# EAGLE board greenhousectrl-latest-monday-no-errors-fixed-cap (EAGLE 7.7.0)
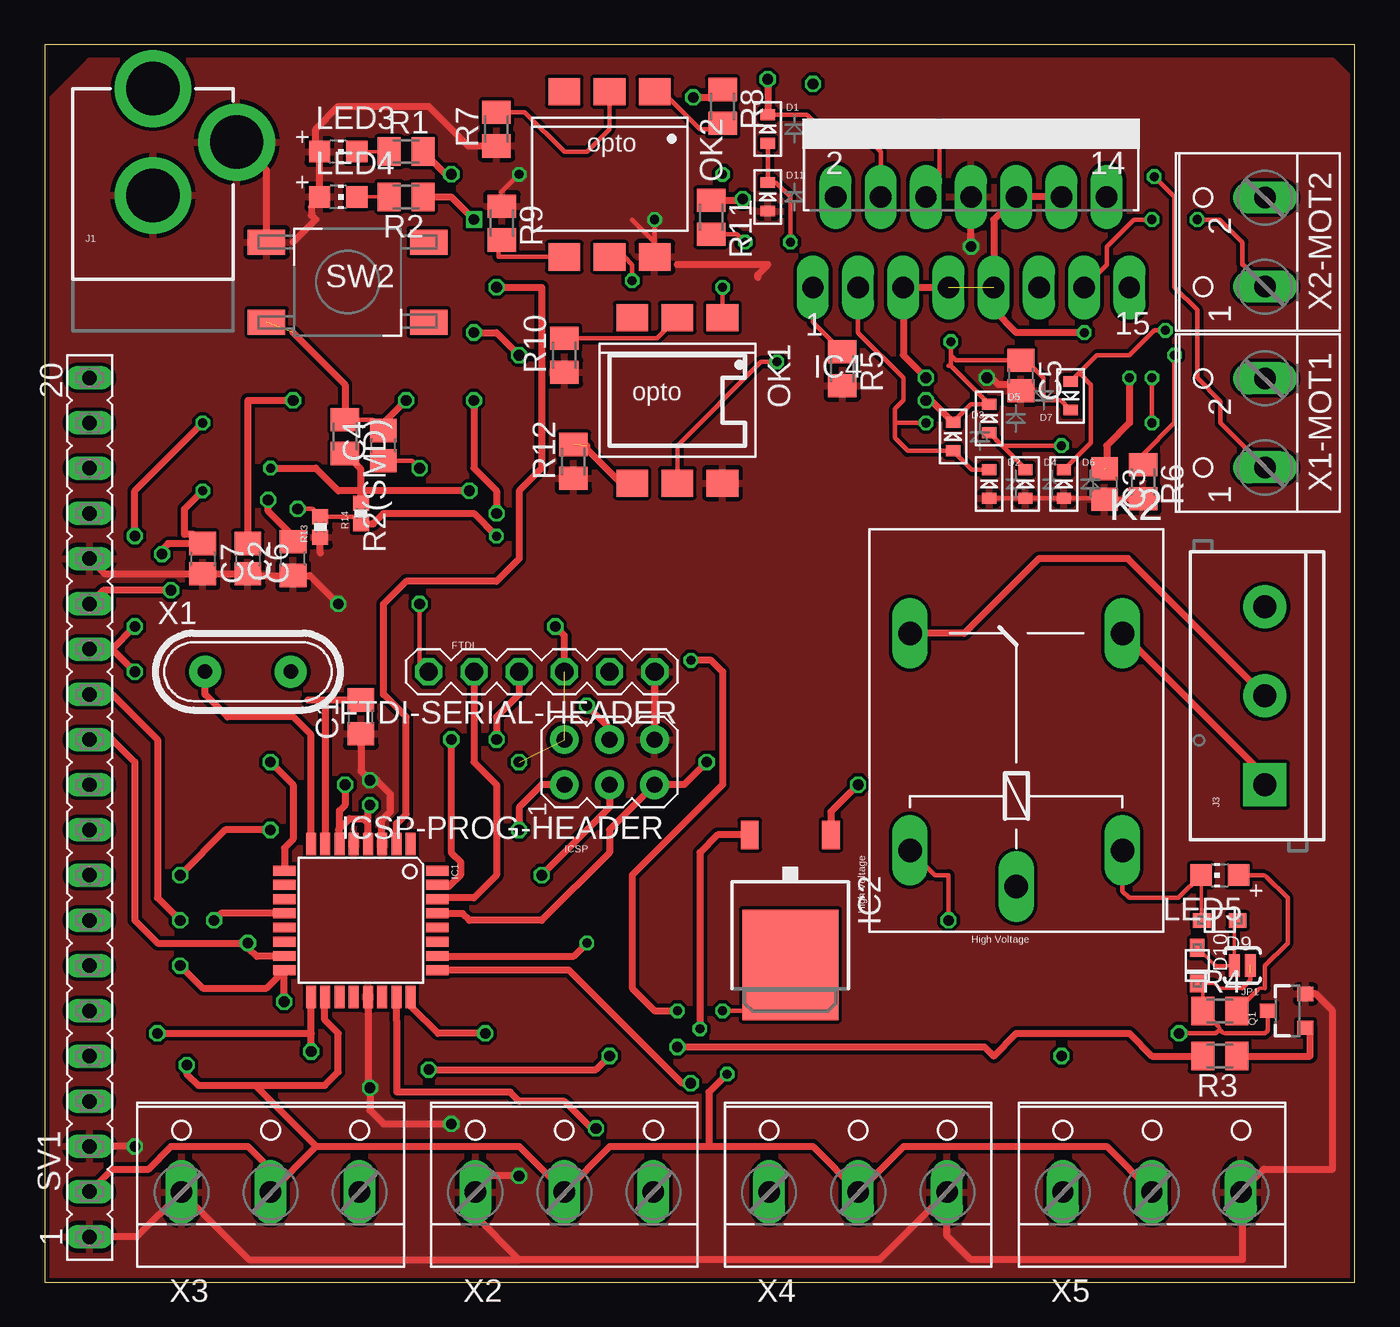
[diagram p0: board, top side]
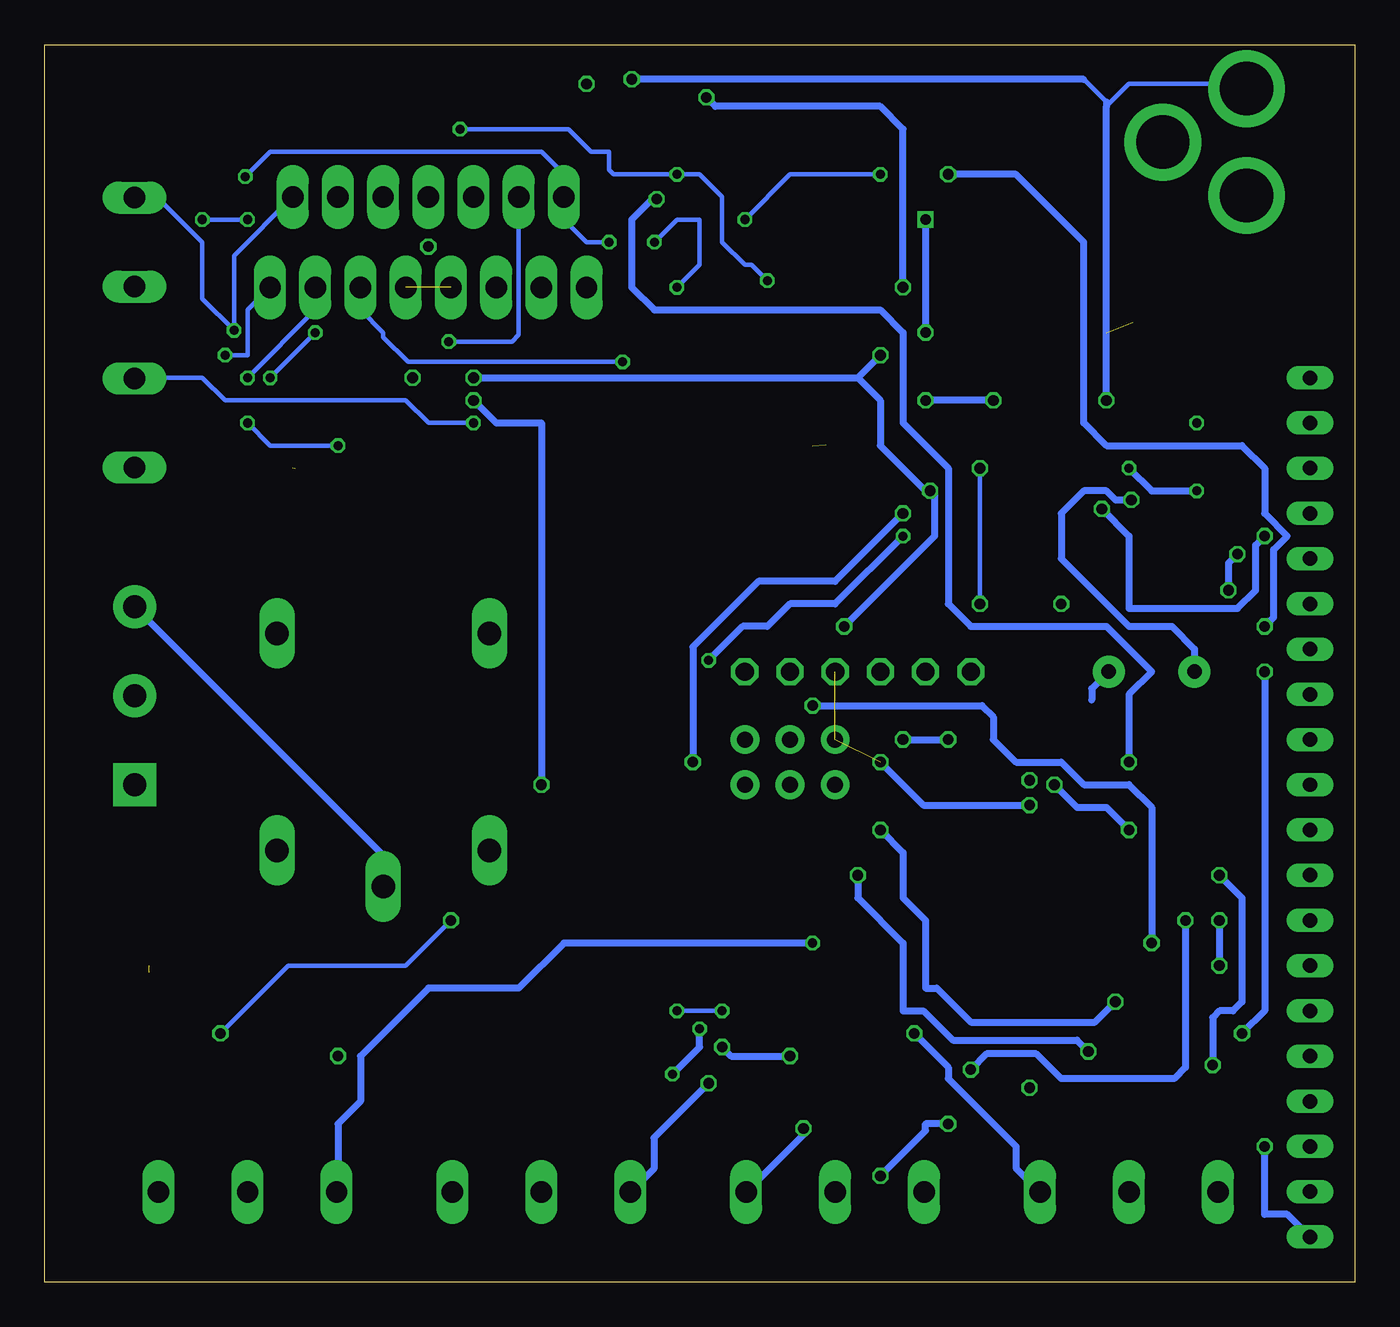
[diagram p1: board, bottom side, seen from below]

Size 73.64 x 69.52 mm. Coordinates in mm from the lower left corner, seen from the top.
Outline: 0,0 73.64,0 73.64,69.52 0,69.52 0,0
Copper layers (1*16): Top 0.035mm / dielectric 1.5mm / Bottom 0.035mm
Design rules "Dirty8TS *": minimum track width 8mil, minimum drill 15mil, track to track 8mil, track to pad 8mil, pad to pad 8mil, via to via 8mil, smd to smd 0mil, copper to edge 10mil, drill to drill 10mil, minimum pad ring 10mil, minimum via ring 6mil, stop-mask expansion 2mil, vias tented up to drill 25mil, thermal gap 10mil

## Footprints (pad centres in the part's own frame; a part is rotated, then mirrored left to right if it is on the bottom)
C0805 = smd 1.3 x 1.5: 1 -0.95,0; 2 0.95,0
C0805' = smd 1.3 x 1.5: 1 -0.85,0; 2 0.85,0
SOD-523 = smd 0.8 x 0.6: A 0,-0.8; K 0,0.8
SOD-323F = smd 1 x 0.8: A -1,0; C 1,0
06X1-PTH = drill 1.016 octagon: 1 -6.35,0; 2 -3.81,0; 3 -1.27,0; 4 1.27,0; 5 3.81,0; 6 6.35,0
TQFP32-08 = smd 1.27 x 0.559: 1 -4.293,2.8; 2 -4.293,2; 3 -4.293,1.2; 4 -4.293,0.4; 5 -4.293,-0.4; 6 -4.293,-1.2; 7 -4.293,-2; 8 -4.293,-2.8; 17 4.293,-2.8; 18 4.293,-2; 19 4.293,-1.2; 20 4.293,-0.4; 21 4.293,0.4; 22 4.293,1.2; 23 4.293,2; 24 4.293,2.8 | smd 0.559 x 1.27: 9 -2.8,-4.293; 10 -2,-4.293; 11 -1.2,-4.293; 12 -0.4,-4.293; 13 0.4,-4.293; 14 1.2,-4.293; 15 2,-4.293; 16 2.8,-4.293; 25 2.8,4.293; 26 2,4.293; 27 1.2,4.293; 28 0.4,4.293; 29 -0.4,4.293; 30 -1.2,4.293; 31 -2,4.293; 32 -2.8,4.293
TO252 = smd 1 x 1.6: 1 -2.28,-4.8; 2 2.28,-4.8 | smd 5.4 x 6.2: 3 0,2.5
MULTIWATT-15 = drill 1.2 long: 1 -8.89,-7.62; 2 -7.62,-2.54; 3 -6.35,-7.62; 4 -5.08,-2.54; 5 -3.81,-7.62; 6 -2.54,-2.54; 7 -1.27,-7.62; 8 0,-2.54; 9 1.27,-7.62; 10 2.54,-2.54; 11 3.81,-7.62; 12 5.08,-2.54; 13 6.35,-7.62; 14 7.62,-2.54; 15 8.89,-7.62
AVRISP = drill 0.9 pad 1.626: 1 -1.27,2.54; 2 1.27,2.54; 3 -1.27,0; 4 1.27,0; 5 -1.27,-2.54; 6 1.27,-2.54
POWER_JACK_PTH = drill 2.997 pad 4.318: GND 0,7.7; GNDBREAK 4.7,10.7; PWR 0,13.7
SCREWTERMINAL-5MM-3 = drill 1.3 pad 2.413 square: 1 0,0 | drill 1.3 pad 2.413: 2 5,0; 3 10,0
PAD-JUMPER-2-NO_YES_SILK = smd 0.635 x 1.27: 1 -0.45,0; 2 0.45,0
G5LE = drill 1.321 long: 1 -7.493,-5.969; 2 -7.493,5.969; O 4.699,5.969; P -9.525,0; S 4.699,-5.969
CHIP-LED0805 = smd 1.2 x 1.2: A 0,-1.05; C 0,1.05
DIL6-SMD = smd 1.78 x 1.52: 1 -2.54,-4.645; 2 0,-4.645; 3 2.54,-4.645; 4 2.54,4.645; 5 0,4.645; 6 -2.54,4.645
SOT23-3 = smd 0.8 x 0.9: 1 -0.95,-1; 2 0.95,-1; 3 0,1.1
M0805 = smd 1.3 x 1.6: 1 -0.95,0; 2 0.95,0
0402-RES = smd 0.85 x 0.9: 1 -0.58,0; 2 0.58,0
FE20 = drill 0.813 long: 1 -24.13,0; 2 -21.59,0; 3 -19.05,0; 4 -16.51,0; 5 -13.97,0; 6 -11.43,0; 7 -8.89,0; 8 -6.35,0; 9 -3.81,0; 10 -1.27,0; 11 1.27,0; 12 3.81,0; 13 6.35,0; 14 8.89,0; 15 11.43,0; 16 13.97,0; 17 16.51,0; 18 19.05,0; 19 21.59,0; 20 24.13,0
SPST_NO_SMD = smd 2.108 x 1.397: 1 0,4.496; 2 9.119,4.496; 3 0,0; 4 9.119,0
HC49 = drill 0.813 pad 1.8: 1 -2.413,0; 2 2.413,0
W237-102 = drill 1.194 long: 1 -2.5,-1.27; 2 2.5,-1.27
W237-103 = drill 1.194 long: 1 -5,-1.29; 2 0,-1.29; 3 5,-1.29

## Placement (x,y rotation side)
C1  [C0805]  17.78,31.75 90 top
C2  [C0805]  13.97,40.64 90 top
C3  1.0uF  [C0805']  59.56,44.83 270 top
C4  0.1uF  [C0805']  19.05,46.99 90 top
C5  1.0uF  [C0805']  54.86,50.93 270 top
C6  0.1uF  [C0805']  11.43,40.64 270 top
C7  0.1uF  [C0805']  8.89,40.64 270 top
D1  [SOD-523]  40.64,64.77 0 top
D2  [SOD-523]  53.09,44.83 0 top
D3  [SOD-523]  51.05,47.5 0 top
D4  [SOD-523]  55.12,44.83 0 top
D5  [SOD-523]  53.09,48.51 0 top
D6  [SOD-523]  57.28,44.83 0 top
D7  [SOD-523]  57.66,49.78 180 top
D9  1N4148  [SOD-323F]  66.04,20.32 180 top
D10  Zener  [SOD-323F]  64.77,17.78 270 top
D11  [SOD-523]  40.64,60.96 0 top
FTDI-SERIAL-HEADER  HEADER-06X1-MALE  [06X1-PTH]  27.94,34.29 180 top
IC1  ATMEGA168TQFP-08  [TQFP32-08]  17.78,20.32 270 top
IC2  7824DT  [TO252]  41.91,20.32 180 top
IC4  L298  [MULTIWATT-15]  52.07,63.5 0 top
ICSP-PROG-HEADER  AVRISP-6  [AVRISP]  31.75,29.21 90 top
J1  POWER_JACKPTH  [POWER_JACK_PTH]  6.1,53.34 0 top
J3  [SCREWTERMINAL-5MM-3]  68.58,27.94 90 top
JP1  JUMPER-PAD-2-NOYES_SILK  [PAD-JUMPER-2-NO_YES_SILK]  67.31,17.78 180 top
K2  G5LE  [G5LE]  54.61,31.75 90 top
LED3  [CHIP-LED0805]  16.51,63.5 270 top
LED4  [CHIP-LED0805]  16.51,60.96 270 top
LED5  [CHIP-LED0805]  66.04,22.86 90 top
OK1  4N27SM  [DIL6-SMD]  35.56,49.53 180 top
OK2  4N27SM  [DIL6-SMD]  31.75,62.23 180 top
Q1  MMBT2222A  [SOT23-3]  69.85,15.24 90 top
R1  [M0805]  20.32,63.5 0 top
R2  [M0805]  20.32,60.96 180 top
R2(SMD)  [M0805]  16.89,47.5 270 top
R3  1K  [M0805]  66.04,12.7 180 top
R4  1K  [M0805]  66.04,15.24 0 top
R5  [M0805]  44.83,51.31 270 top
R6  [M0805]  61.72,44.96 270 top
R7  [M0805]  25.4,64.77 90 top
R8  [M0805]  38.1,66.04 270 top
R9  [M0805]  25.7,59.49 270 top
R10  [M0805]  29.21,52.07 90 top
R11  [M0805]  37.47,59.82 270 top
R12  [M0805]  29.72,46.1 90 top
R13  [0402-RES]  15.49,42.42 90 top
R14  [0402-RES]  17.78,43.18 90 top
SV1  [FE20]  2.54,26.67 90 top
SW2  MOMENTARYBUTTON  [SPST_NO_SMD]  21.59,58.42 180 top
X1  CRYSTALS-NOGND-HC49  [HC49]  11.43,34.29 0 top
X1-MOT1  [W237-102]  67.31,48.26 90 top
X2  [W237-103]  29.21,6.35 0 top
X2-MOT2  [W237-102]  67.31,58.42 90 top
X3  [W237-103]  12.7,6.35 0 top
X4  [W237-103]  45.72,6.35 0 top
X5  [W237-103]  62.23,6.35 0 top

## Library data of the parts
C1 C2 = resistor
C3-C7 D1-D7 D10 D11 ICSP-PROG-HEADER LED3-LED5 R1 R2 R2(SMD) R3-R12 = adafruit
D9 = adafruit; PROD_ID: DIO-08378
FTDI-SERIAL-HEADER = GeekAmmo; OTHER: 4UCON 00834; URL: http://www.4uconnector.com/online/SearchPro.asp?FormName=ProSearch&FormAction=search&s_GroupNo=&s_keyword=00834
IC1 = atmega328p
IC2 = linear
IC4 = st-microelectronics; MPN: L298N; OC_FARNELL: 1589425; OC_NEWARK: 32M1527
J1 = SparkFun-Connectors; PROD_ID: CONN-08197
J3 = SparkFun-Connectors; PROD_ID: CONN-10134; STOREFRONT_ID: PRT-08433
JP1 = SparkFun-Passives
K2 = relay; OC_FARNELL: unknown; OC_NEWARK: unknown
OK1 OK2 = optocoupler; MF: FAIRCHILD SEMICONDUCTOR; MPN: 4N27S-M; OC_FARNELL: unknown; OC_NEWARK: 05C3300
Q1 = SparkFun-DiscreteSemi; PROD_ID: TRANS-08049
R13 R14 = SparkFun-Resistors
SV1 = con-lsta; OC_FARNELL: unknown; OC_NEWARK: unknown
SW2 = ece388
X1 = IQD-Frequency-Products
X1-MOT1 X2-MOT2 = con-wago-500; MPN: 237-102; OC_FARNELL: unknown; OC_NEWARK: 70K9898
X2-X5 = ece388; MPN: 237-103; OC_FARNELL: unknown; OC_NEWARK: 18M7116

## Nets
+5V: C3.1 C7.1 FTDI-SERIAL-HEADER.3 IC1.4 IC1.6 IC1.18 IC2.2 IC4.5 IC4.7 IC4.9 IC4.10 IC4.12 ICSP-PROG-HEADER.2 R2(SMD).2 R2.1 R14.2 SV1.2 SV1.15 X2.2 X3.2 X4.2 X5.2
+12V: C5.1 C6.1 D1.K D3.K D5.K D7.K IC2.1 IC4.4 J1.PWR
ADC4: SV1.4
ADC5: SV1.5
COIL: D10.C JP1.1 K2.2 Q1.3 R4.1
COMMON: J3.3 K2.P
CTS(DOESNTEXIST): FTDI-SERIAL-HEADER.2
DIODENODE: D9.A D10.A JP1.2
DTR: C4.1 FTDI-SERIAL-HEADER.6
ENA: IC4.6 OK2.5
ENB: IC4.11 OK1.5
GND: C1.1 C2.1 C3.2 C5.2 C6.2 C7.2 D2.A D4.A D6.A D11.A FTDI-SERIAL-HEADER.1 IC1.3 IC1.5 IC1.21 IC4.8 ICSP-PROG-HEADER.6 J1.GND J1.GNDBREAK LED3.A LED4.A OK1.6 OK2.6 Q1.2 R5.2 R6.2 R7.1 R9.1 R10.1 R12.1 R13.1 SV1.1 SV1.3 SV1.16 SW2.4 X2.1 X3.1 X4.3 X5.3
MISO: IC1.16 ICSP-PROG-HEADER.1 SV1.13
MOSI: IC1.15 ICSP-PROG-HEADER.4 SV1.12
N$1: OK2.1 R8.2
N$2: LED4.C R2.2
N$3: LED5.A R4.2
N$4: OK2.2 R7.2
N$5: OK2.4 R9.2
N$6: Q1.1 R3.1
N$7: IC2.3 R13.2 R14.1
N$8: OK1.1 R11.2
N$9: OK1.2 R10.2
N$10: LED3.C R1.1
N$11: C1.2 IC1.7 X1.2
N$13: C2.2 IC1.8 X1.1
N$15: OK1.4 R12.2
NC: J3.1 K2.S
NO: J3.2 K2.O
OUT1: D1.A D11.K IC4.2 X1-MOT1.1
OUT2: D2.K D3.A IC4.3 X1-MOT1.2
OUT3: D4.K D5.A IC4.13 X2-MOT2.1
OUT4: D6.K D7.A IC4.14 X2-MOT2.2
PB0: IC1.12 R3.2
PB1: IC1.13
PB2: IC1.14
PC0: IC1.23 X2.3
PC1: IC1.24 X3.3
PC2: IC1.25 X4.1
PC3: IC1.26 X5.1
PC4: IC1.27
PC5: IC1.28
PD2: IC1.32
PD3: IC1.1
PD4: IC1.2 R8.1
PD5: IC1.9 R11.1
PD6: IC1.10
PD7: IC1.11
RST: C4.2 IC1.29 ICSP-PROG-HEADER.5 R2(SMD).1 SW2.2
RX: FTDI-SERIAL-HEADER.5 IC1.30
SCK: IC1.17 ICSP-PROG-HEADER.3 R1.2 SV1.14
SEN_A: IC4.1 R5.1
SEN_B: IC4.15 R6.1
SS: SV1.11
TX: FTDI-SERIAL-HEADER.4 IC1.31
VCC: D9.C K2.1 LED5.C

## Tracks (layer width: path | path; a pad name or v marks a point on that pad's centre or on a via)
+5V  (via drill 0.51, 0.6)  (4 unrouted)
  Top 0.406: SV1.2 3.81,6.35 5.84,6.35 7.11,7.62 11.43,7.62 12.7,6.35 X3.2 15.26,7.62 | 15.26,7.62 26.67,7.62 29.21,5.08 X2.2 31.77,7.62 37.34,7.62 | 37.34,7.62 43.18,7.62 45.72,5.08 X4.2 48.28,7.62 59.69,7.62 62.23,5.08 X5.2 | v23.88,44.45 17.78,44.45 | 18.16,25.78 17.91,26.04 17.14,26.04 16.51,25.4 16.58,25.33 IC1.6 16.58,26.49 16.89,26.8 v16.89,27.94 | 18.16,25.78 18.16,24.63 IC1.4 18.18,25.8 | v49.53,50.8 48.26,52.07 IC4.5 IC4.7 | v12.7,25.4 10.16,25.4 v7.62,22.86 | v8,12.19 8,11.68 8.64,11.05 11.83,11.05 | 11.83,11.05 15.26,7.62 | 11.83,11.05 15.75,11.05 16.51,11.81 16.51,13.97 15.75,14.73 15.75,15.99 IC1.18 | IC2.2 37.82,25.12 36.83,24.13 v36.83,14.22 | v7.11,38.86 3.3,38.86 SV1.15 | v60.96,50.8 60.96,48.26 59.69,46.99 59.69,45.72 | v58.42,53.34 54.61,53.34 53.34,54.61 IC4.9 53.34,59.69 IC4.10 IC4.12 | v18.29,26.8 18.16,26.67 18.16,25.78 | FTDI-SERIAL-HEADER.3 29.21,36.32 v28.7,36.83 | v38.35,11.68 37.34,10.67 37.34,7.62 | R14.2 17.78,44.45 | 17.78,44.45 17.78,45.66 R2(SMD).2 | v8.89,44.45 7.87,43.43 7.87,42 8.38,42 C7.1 6.95,41.49 6.6,41.15 v6.6,40.89 | v12.7,45.72 15.24,45.72 16.51,44.45 17.78,44.45 | R2.1 22.86,60.96 v24.13,59.69 | v24.13,53.34 25.4,53.34 v26.67,52.07
  Bottom 0.254: v60.96,50.8 v58.42,53.34
  Bottom 0.406: v49.53,50.8 27.94,50.8 | 27.94,50.8 26.67,49.53 26.67,46.99 24.13,44.45 v23.88,44.45 23.62,44.2 23.62,41.91 v28.7,36.83 | v7.62,22.86 6.35,21.59 6.35,15.75 6.86,15.24 7.62,15.24 8,14.86 v8,12.19 | v26.67,29.21 24.26,26.8 v18.29,26.8 | v16.89,27.94 15.62,26.67 13.97,26.67 v12.7,25.4 | v38.35,11.68 36.83,13.21 v36.83,14.22 | v12.7,45.72 11.43,44.45 v8.89,44.45 | v6.6,40.89 7.11,40.39 v7.11,38.86 | v24.13,59.69 v24.13,53.34 | v26.67,52.07 27.94,50.8
+12V  (via drill 0.51, 0.6)
  Top 0.254: IC4.4 46.99,63.5 45.72,64.77 43.65,64.77 42.85,65.57 D1.K | v50.93,52.83 50.93,52.07 | 50.93,52.07 50.93,51.6 50.8,51.47 50.93,51.47 D5.K 52.07,49.31 D3.K | 50.93,52.07 51.22,51.78 C5.1 55.16,51.78 56.13,50.8 56.13,49.53 57.11,49.53 D7.K
  Top 0.406: C6.1 11.43,49.53 v13.97,49.53 | v40.64,67.56 D1.K | D3.K 49.82,49.53 v49.53,49.53 | v45.72,27.94 44.19,26.41 IC2.1
  Bottom 0.254: IC4.4 46.99,53.21 47.37,52.83 v50.93,52.83 | 13.97,66.04 12.7,67.31 7.89,67.31 7.62,67.04 J1.PWR | 15.24,67.56 13.97,66.29
  Bottom 0.406: v13.97,49.53 13.97,66.04 13.97,66.29 | 15.24,67.56 v40.64,67.56 | v49.53,49.53 48.26,48.26 45.72,48.26 v45.72,27.94
COIL  (via drill 0.6)  (1 unrouted)
  Top 0.203: 66.04,14.19 arc45 65.97,14.36 | 66.18,14.04 arc45 66.36,13.97 | 68.58,13.97 68.68,14.07 | R4.1 65.09,16.36 arc45 65.02,16.53 D10.C 65.67,16.78 arc-45 65.84,16.71 66.04,16.51 67.31,16.51
  Top 0.254: 65.97,14.36 R4.1 | 66.18,14.04 66.04,14.19 65.83,13.97 v63.75,13.97 | 66.36,13.97 68.58,13.97 | 68.68,14.07 arc45 68.75,14.24 Q1.3 | K2.2 50.04,22.86 50.8,22.86 v50.8,20.32 | 67.77,17.4 67.77,16.96 67.31,16.51
  Bottom 0.254: v50.8,20.32 53.34,17.78 59.94,17.78 v63.75,13.97
COMMON
  Bottom 0.406: J3.3 54.61,23.97 K2.P
DIODENODE
  Top 0.203: D9.A 66.93,20.21 arc45 66.86,20.04 JP1.2 65.88,17.78 arc-45 65.7,17.85 D10.A
DTR  (via drill 0.6)
  Top 0.254: C4.1 20.66,46.14 v21.08,45.72 | v21.08,38.1 21.08,34.8 FTDI-SERIAL-HEADER.6
  Bottom 0.254: v21.08,45.72 v21.08,38.1
ENA  (via drill 0.51)
  Top 0.254: OK2.5 32.59,57.59 33.02,57.15 v33.02,56.26 | v50.29,64.77 50.29,61.72 IC4.6
  Bottom 0.254: v50.29,64.77 44.2,64.77 42.93,63.5 41.91,63.5 41.91,62.48 41.66,62.23 v38.1,62.23 36.83,62.23 35.56,60.96 35.56,58.42 34.29,57.15 33.91,57.15 v33.02,56.26
ENB  (via drill 0.51)
  Top 0.254: OK1.5 35.56,46.99 40.26,51.69 v41.15,51.69
  Bottom 0.254: IC4.11 55.88,54.61 54.61,53.34 54.61,53.09 53.21,51.69 v41.15,51.69
GND  (via drill 0.51, 0.6)
  Top 0.203: LED4.A 15.09,60.59 arc45 15.01,60.41
  Top 0.254: D2.A D4.A D6.A 59.51,44.03 C3.2 61.7,43.98 R6.2 | OK2.6 34.29,58.42 | 34.29,58.42 v34.29,59.69 | v26.67,62.23 25.65,61.21 | 33.02,59.69 34.29,58.42
  Top 0.406: 71.09,16.43 Q1.2 71.44,16.19 72.39,15.24 72.39,6.35 68.52,6.35 X5.3 67.31,4.98 67.31,1.27 52.07,1.27 50.72,2.62 X4.3 46.93,1.27 26.67,1.27 | 26.67,1.27 24.21,3.73 X2.1 | 26.67,1.27 11.49,1.27 X3.1 5.18,2.54 SV1.1 | v5.08,7.62 SV1.3 | SV1.16 3.39,39.79 C7.2 C6.2 11.53,39.69 C2.1 14.92,39.69 v16.51,38.1 | 15.49,41.66 R13.1 | FTDI-SERIAL-HEADER.1 ICSP-PROG-HEADER.6 | C1.1 17.78,28.7 v18.29,28.19 18.67,28.19 19.43,27.43 19.43,26.42 18.92,25.91 18.92,24.67 IC1.3 | IC1.21 18.18,11.03 v18.29,10.92 18.29,9.65 19.05,8.89 v22.86,8.89 | C5.2 54.52,50.42 53.59,50.42 53.21,50.8 v52.96,50.8 | v52.07,58.17 IC4.8 | LED4.A LED3.A 15.24,63.72 15.24,64.77 16.51,66.04 21.59,66.04 23.81,63.82 R7.1 | 40.08,56.44 40.08,56.59 40.64,57.15 35.56,57.15 | 15.01,60.41 15.01,59.92 15.24,59.69 13.97,58.42 | 15.49,40.96 15.49,41.66 | 15.49,41.66 15.24,41.91 | v26.67,5.97 25.02,5.97 24.13,5.08 | SW2.4 12.47,62.46 11.43,63.5
  Bottom 0.254: v34.29,59.69 31.75,62.23 v26.67,62.23
  Bottom 0.406: SV1.1 3.81,3.81 5.08,3.81 v5.08,7.62 | v22.86,8.89 24.13,8.89 24.13,8.51 v26.67,5.97
  cutout Bottom (isolate 0.406): 0,0 0,66.04 2.54,68.58 71.12,68.58 73.66,66.04 73.66,0
  pour Top: 0,0 73.66,0 73.66,67.31 72.39,68.58 2.54,68.58 0,66.04
  cutout Bottom: 0,0 0,66.04 2.54,68.58 5.08,68.58 71.12,68.58 73.66,66.04 73.66,0
MISO  (via drill 0.6)
  Top 0.406: ICSP-PROG-HEADER.1 27.94,27.94 26.67,26.67 v26.67,25.4 | v13.46,15.75 13.46,17.5 IC1.16 12.48,16.51 8.89,16.51 v7.62,17.78 | SV1.13 3.81,33.02 6.35,30.48 6.35,21.59 v7.62,20.32
  Bottom 0.406: v26.67,25.4 25.4,24.13 25.4,21.59 24.13,20.32 24.13,16.51 23.5,16.51 21.59,14.61 14.61,14.61 v13.46,15.75 | v7.62,20.32 v7.62,17.78
MOSI  (via drill 0.6)
  Top 0.406: ICSP-PROG-HEADER.4 31.75,31.11 v30.48,32.38 | SV1.12 3.81,30.48 5.08,29.21 5.08,20.32 6.35,19.05 v11.43,19.05 11.43,18.8 11.94,18.29 11.97,18.32 IC1.15
  Bottom 0.406: v30.48,32.38 20.95,32.38 20.32,31.75 20.32,30.48 19.05,29.21 16.51,29.21 15.24,27.94 12.7,27.94 11.43,26.67 v11.43,19.05
N$1
  Top 0.254: R8.2 37.78,64.77 36.83,64.77 34.73,66.88 OK2.1
N$2
  Top 0.203: LED4.C R2.2
N$3
  Top 0.203: 68.19,16.44 arc-45 68.36,16.51 68.58,16.51 | 68.65,22.79 arc45 68.47,22.86
  Top 0.254: R4.2 68.19,16.44 | 68.58,16.51 68.58,17.78 69.85,19.05 69.85,21.59 68.65,22.79 | 68.47,22.86 LED5.A
N$4
  Top 0.254: OK2.2 31.75,64.77 30.48,63.5 29.21,63.5 26.99,65.72 R7.2
N$5
  Top 0.254: OK2.4 25.52,57.59 25.52,58.35 R9.2
N$6
  Top 0.406: R3.1 71.12,12.7 71.12,14.29 Q1.1
N$7  (via drill 0.51, 0.6)
  Top 0.254: v38.1,15.24 39.33,15.24 IC2.3 | R14.1 17.38,43 R13.2 15.06,43.43 v14.22,43.43
  Top 0.406: R14.1 18.47,42.6 19.05,43.18 24.13,43.18 v25.4,41.91 | v35.56,15.24 34.29,15.24 33.02,16.51 33.02,22.86 38.1,27.94 38.1,34.29 37.47,34.92 v36.32,34.92 | v5.08,41.91 5.08,44.45 v8.89,48.26
  Bottom 0.254: v35.56,15.24 v38.1,15.24
  Bottom 0.406: v14.22,43.43 12.7,41.91 12.7,37.85 6.6,37.85 5.59,38.86 5.59,41.4 v5.08,41.91 | v25.4,41.91 29.21,38.1 31.75,38.1 33.02,36.83 34.42,36.83 v36.32,34.92
N$8  (via drill 0.51)
  Top 0.254: OK1.1 v38.1,55.88 | v39.37,58.42 38.92,58.87 R11.2
  Bottom 0.254: v38.1,55.88 36.83,57.15 36.83,59.69 38.1,59.69 v39.37,58.42
N$9
  Top 0.254: R10.2 34.41,53.02 OK1.2
N$10
  Top 0.203: LED3.C R1.1
N$11  (1 unrouted)
  Top 0.406: 15.78,32.7 C1.2 | 14.79,32.7 15.78,32.7 | 15.78,32.7 IC1.7
  Bottom 0.406: X1.2 14.79,33.34 14.79,32.7
N$13  (via drill 0.6)
  Top 0.406: IC1.8 14.98,30.74 13.97,31.75 10.29,31.75 9.02,33.02 X1.1 | C2.2 13.97,41.91 12.57,43.31 v12.57,43.94
  Bottom 0.406: v12.57,43.94 13.46,43.94 13.97,44.45 15.24,44.45 16.51,43.18 16.51,40.64 12.7,36.83 10.29,36.83 9.02,35.56 X1.1
N$14  (via drill 0.6)
  other vias: 57.15,12.7
N$15  (1 unrouted)
  Top 0.254: OK1.4 32.39,44.88
  Top 0.406: 32.39,44.88 30.48,46.8 30.48,46.99
N$16  (via drill 0.6)
  other vias: 43.18,67.31
NC
  Top 0.406: K2.S 68.58,28.45 J3.1
NO
  Top 0.406: J3.2 60.88,40.64 55.88,40.64 51.69,36.45 K2.O
OUT1  (via drill 0.51)
  Top 0.254: D1.A D11.K 41.11,61.76 41.91,60.96 v41.91,58.42 | X1-MOT1.1 66.08,48.26 66.08,49.49 64.77,50.8 64.77,54.61 63.5,55.88 63.5,60.96 v62.36,62.1
  Bottom 0.254: v41.91,58.42 43.18,58.42 44.45,59.69 IC4.2 44.45,62.23 45.72,63.5 60.96,63.5 v62.36,62.1
OUT2  (via drill 0.51)
  Top 0.254: D2.K 52.12,45.63 D3.A 48.51,46.7 47.79,47.42 47.79,48.26 | v49.53,48.26 47.79,48.26 | 47.79,48.26 47.79,49.06 48.26,49.53 48.26,50.8 45.72,53.34 IC4.3
  Bottom 0.254: X1-MOT1.2 68.54,50.8 64.77,50.8 63.5,49.53 53.34,49.53 52.07,48.26 v49.53,48.26
OUT3  (via drill 0.51)
  Top 0.254: D4.K 55.12,45.68 D5.A 53.81,46.99 v57.15,46.99 | X2-MOT2.1 67.35,57.15 67.31,57.15 67.31,58.42 66.04,59.69 v64.77,59.69 | v62.23,48.26 v62.23,50.8 | IC4.13 59.69,57.15 59.69,58.17 61.21,59.69 v62.23,59.69
  Bottom 0.254: v62.23,50.8 58.42,54.61 IC4.13 | v62.23,59.69 v64.77,59.69 | v62.23,48.26 60.96,46.99 v57.15,46.99
OUT4  (via drill 0.51)
  Top 0.254: 57.7,50.55 D7.A 58.15,51.07 | D6.K 58.8,47.16 58.8,50.42 58.15,51.07 | v62.99,53.47 62.36,53.47 60.96,52.07 59.14,52.07 58.15,51.07
  Bottom 0.254: IC4.14 62.99,57.66 v62.99,53.47 64.77,55.24 64.77,58.42 67.27,60.92 X2-MOT2.2
PB0  (via drill 0.6)
  Top 0.406: IC1.12 9.93,20.72 v9.53,20.32 | v21.59,11.94 30.99,11.94 v31.75,12.7 | R3.2 62.23,12.7 60.96,13.97 54.61,13.97 53.34,12.7 52.83,13.21 v35.56,13.21
  Bottom 0.406: v9.53,20.32 9.53,12.06 10.16,11.43 16.51,11.43 17.91,12.83 20.7,12.83 v21.59,11.94 | v35.56,13.21 35.05,12.7 v31.75,12.7
PC0  (via drill 0.6)
  Top 0.406: IC1.23 19.78,14.7 19.81,14.67 19.81,10.67 26.16,10.67 26.67,10.16 29.21,10.16 30.73,8.64 v30.99,8.64
  Bottom 0.406: X2.3 30.99,8.28 v30.99,8.64
PC1  (via drill 0.6)
  Top 0.406: IC1.24 20.58,15.5 22.11,13.97 v24.77,13.97
  Bottom 0.406: X3.3 19.05,6.41 19.05,7.62 22.86,11.43 22.86,12.06 v24.77,13.97
PC2  (via drill 0.6)
  Top 0.406: v36.32,11.18 35.81,11.18 29.47,17.52 IC1.25
  Bottom 0.406: X4.1 39.4,6.38 | 39.4,6.38 39.37,6.41 | v36.32,11.18 39.4,8.1 39.4,6.38
PC3  (via drill 0.51)
  Top 0.406: IC1.26 29.75,18.32 v30.48,19.05
  Bottom 0.406: v30.48,19.05 44.45,19.05 46.99,16.51 52.07,16.51 55.88,12.7 55.88,10.16 57.15,8.89 57.15,5.14 X5.1
PD4  (via drill 0.6)
  Top 0.406: IC1.2 19.78,25.75 20.32,26.29 20.32,31.75 19.05,33.02 19.05,38.1 20.32,39.37 25.4,39.37 26.67,40.64 26.67,44.45 27.94,45.72 27.94,55.88 v25.4,55.88 | 37.78,67.31 R8.1 37.66,66.55 v36.45,66.55
  Bottom 0.406: v25.4,55.88 25.4,64.77 26.67,66.04 35.94,66.04 v36.45,66.55
PD5  (via drill 0.6)
  Top 0.406: R11.1 39.18,60.77 v39.24,60.83 | v12.7,29.21 13.97,27.94 13.97,24.87 13.49,24.39 IC1.9
  Bottom 0.406: v39.24,60.83 39.5,60.83 40.64,59.69 40.64,55.88 39.37,54.61 26.67,54.61 25.4,53.34 25.4,48.26 22.86,45.72 22.86,38.1 21.59,36.83 13.97,36.83 11.43,34.29 12.7,33.02 v12.7,29.21
RST  (via drill 0.6)  (1 unrouted)
  Top 0.254: R2(SMD).1 18.44,48.45 C4.2
  Top 0.406: 18.95,47.94 C4.2 19.05,48.26 v20.32,49.53 | R2(SMD).1 16.89,50.42 13.97,53.34 | v24.13,49.53 24.13,45.72 25.4,44.45 v25.4,43.18 | IC1.29 22.09,20.7 23.5,20.7 23.88,20.32 27.94,20.32 31.75,24.13 31.75,25.4 ICSP-PROG-HEADER.5 35.94,27.94 v37.21,29.21
  Bottom 0.406: v20.32,49.53 v24.13,49.53 | v25.4,43.18 29.21,39.37 33.53,39.37 37.21,35.69 v37.21,29.21
RX
  Top 0.406: IC1.30 22.14,21.59 24.13,21.59 25.4,22.86 25.4,27.94 24.13,29.21 FTDI-SERIAL-HEADER.5
SCK  (via drill 0.6)
  Top 0.406: 3.81,35.56 v5.08,36.83 | v22.86,62.23 22.54,62.23 R1.2 | ICSP-PROG-HEADER.3 31.75,26.67 v27.94,22.86 | v14.99,12.95 14.99,13.97 | 14.99,13.97 IC1.17 | SV1.14 3.81,35.56 | 3.81,35.56 v5.08,34.29 | v6.35,13.97 14.99,13.97
  Bottom 0.406: v22.86,62.23 19.05,62.23 15.24,58.42 15.24,48.26 13.97,46.99 6.35,46.99 5.08,45.72 5.08,43.18 3.81,41.91 4.57,41.15 4.57,37.34 v5.08,36.83 | v27.94,22.86 27.94,21.59 25.4,19.05 25.4,15.24 24.26,15.24 22.61,13.59 15.62,13.59 v14.99,12.95 | v5.08,34.29 5.08,15.24 v6.35,13.97
SEN_A
  Top 0.254: R5.1 43.18,53.91 IC4.1
SEN_B  (via drill 0.51)
  Top 0.254: v63.5,52.07 63.5,48.26 61.72,46.48 R6.1
  Bottom 0.254: v63.5,52.07 62.23,52.07 62.23,54.61 IC4.15
TX  (via drill 0.6)
  Top 0.406: FTDI-SERIAL-HEADER.4 26.67,33.02 25.4,31.75 v25.4,30.48 | v22.86,30.48 22.86,24.13 23.37,23.62 23.37,22.86 22.73,22.23 22.17,22.23 IC1.31
  Bottom 0.406: v25.4,30.48 v22.86,30.48
VCC
  Top 0.203: LED5.C 64.99,20.44 arc45 D9.C
  Top 0.254: LED5.C 63.72,21.59 60.96,21.59 60.58,21.97 K2.1

## Text on the board
tPlace: opto | opto | FTDI | ICSP | High Voltage | High Voltage